# EAGLE board Sensor Board@3235be6d76c845ecb669902bdd898175 (EAGLE 6.4)
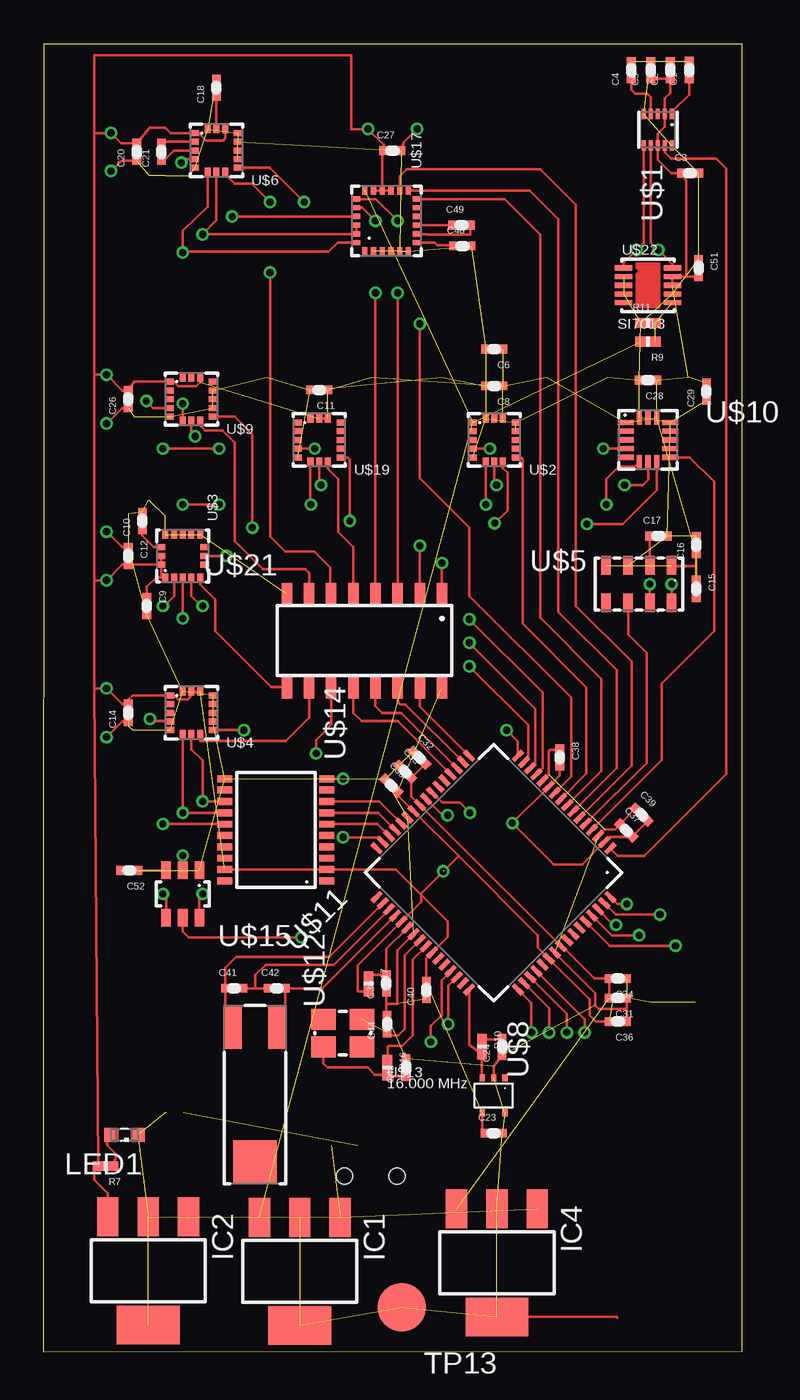
[diagram p0: board, top side]
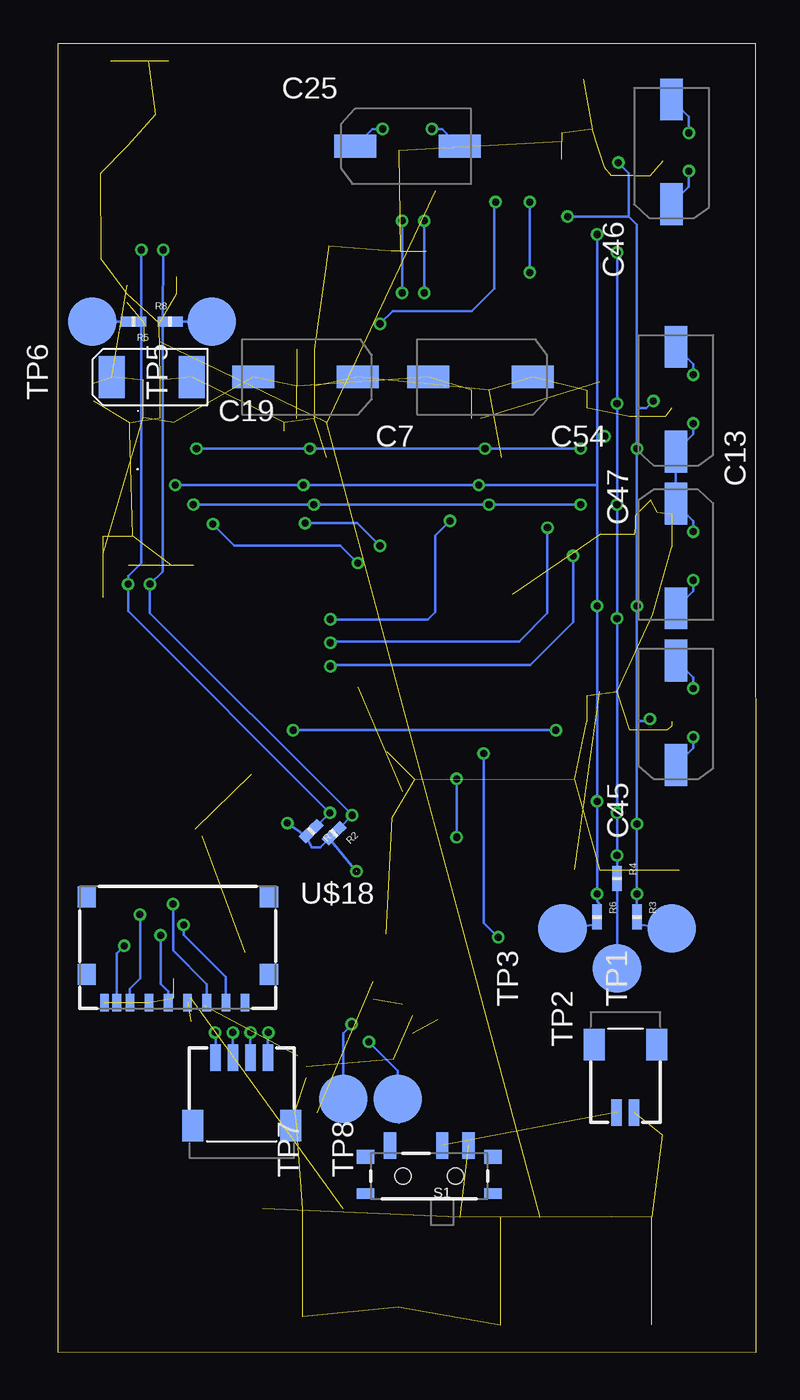
[diagram p1: board, bottom side, seen from below]

Size 40.03 x 75.05 mm. Coordinates in mm from the lower left corner, seen from the top.
Outline: 40.03,0.03 0,0 0.03,75.05 40.03,75.05 40.03,0.03
Copper layers (1*2*15*16): Top 0.035mm / dielectric 0.2mm / Route2 0.0175mm / dielectric 1.1mm / Route15 0.0175mm / dielectric 0.2mm / Bottom 0.035mm
Design rules "SeeedStudio_DRU_no_angle_20130527": minimum track width 6mil, minimum drill 12mil, track to track 6mil, track to pad 6mil, pad to pad 6mil, via to via 6mil, smd to smd 0mil, copper to edge 10mil, drill to drill 10mil, minimum pad ring 6mil, minimum via ring 6mil, stop-mask expansion 2mil, vias tented up to drill 25mil, thermal gap 10mil

## Footprints (pad centres in the part's own frame; a part is rotated, then mirrored left to right if it is on the bottom)
C0402 = smd 0.5 x 0.5: 1 -0.5,0; 2 0.5,0
4.3X7.3SMD = smd 2.4 x 1.3: P$1 -3,0; P$2 3,0
EIA6032 = smd 1.5 x 2.4: P$1 -2.3,0; P$2 2.3,0
SOT223 = smd 1.219 x 2.235: 1 -2.311,-3.099; 2 0,-3.099; 3 2.311,-3.099 | smd 3.6 x 2.2: 4 0,3.099
501568-0207 = smd 0.6 x 1.5: P$1 -0.5,3.9; P$2 0.5,3.9 | smd 1.2 x 1.8: P$5 -1.8,0; P$6 1.8,0
LED_SML0603 = smd 0.8 x 0.8: A 0.75,0; C -0.75,0
R0402 = smd 0.6 x 0.55: 1 -0.425,0; 2 0.425,0
SWITCH-SPST-SMD-A = smd 0.7 x 1.5: 1 -2.25,-1.75; 2 -0.75,-1.75; 3 2.25,-1.75 | smd 1 x 0.6: GND1 -3.65,1; GND3 3.65,1 | smd 1 x 0.8: GND2 -3.65,-1.1; GND4 3.65,-1.1 | hole 0.9: -1.5,0; 1.5,0
TESTPAD(ROUND) = smd 2.794 x 2.794: P$1 0,0
DFN-10(2X2) = smd 0.6 x 0.225: P$1 -0.9,0.8; P$2 -0.9,0.4; P$3 -0.9,0; P$4 -0.9,-0.4; P$5 -0.9,-0.8; P$6 0.9,-0.8; P$7 0.9,-0.4; P$8 0.9,0; P$9 0.9,0.4; P$10 0.9,0.8
LGA-16(3X3) = smd 0.45 x 0.345: P$1 -1.225,1; P$2 -1.225,0.5; P$3 -1.225,0; P$4 -1.225,-0.5; P$5 -1.225,-1; P$9 1.225,-1; P$10 1.225,-0.5; P$11 1.225,0; P$12 1.225,0.5; P$13 1.225,1 | smd 0.345 x 0.45: P$6 -0.5,-1.225; P$7 0,-1.225; P$8 0.5,-1.225; P$14 0.5,1.225; P$15 0,1.225; P$16 -0.5,1.225
LGA-8(5X3) = smd 0.55 x 1.05: P$1 -1.875,-1.075; P$2 -0.625,-1.075; P$3 0.625,-1.075; P$4 1.875,-1.075; P$5 1.875,1.075; P$6 0.625,1.075; P$7 -0.625,1.075; P$8 -1.875,1.075
501568-0407 = smd 0.6 x 1.5: P$1 -1.5,3.9; P$2 -0.5,3.9; P$3 0.5,3.9; P$4 1.5,3.9 | smd 1.2 x 1.8: P$5 -2.8,0; P$6 2.8,0
SOT323-5L = smd 0.4 x 0.3: P$1 1,-0.65; P$2 1,0; P$3 1,0.65; P$4 -1,0.65; P$5 -1,-0.65
LGA-16(3X3.25) = smd 0.925 x 0.3: P$1 -1.274,1; P$2 -1.274,0.5; P$3 -1.274,0; P$4 -1.274,-0.5; P$5 -1.274,-1; P$9 1.274,-1; P$10 1.274,-0.5; P$11 1.274,0; P$12 1.274,0.5; P$13 1.274,1 | smd 0.3 x 0.8: P$6 -0.5,-1.275; P$7 0,-1.275; P$8 0.5,-1.275; P$14 0.5,1.275; P$15 0,1.275; P$16 -0.5,1.275
S-PQFP-G64 = smd 0.75 x 0.27: P$1 -5.725,3.75; P$2 -5.725,3.25; P$3 -5.725,2.75; P$4 -5.725,2.25; P$5 -5.725,1.75; P$6 -5.725,1.25; P$7 -5.725,0.75; P$8 -5.725,0.25; P$9 -5.725,-0.25; P$10 -5.725,-0.75; P$11 -5.725,-1.25; P$12 -5.725,-1.75; P$13 -5.725,-2.25; P$14 -5.725,-2.75; P$15 -5.725,-3.25; P$16 -5.725,-3.75; P$33 5.725,-3.75; P$34 5.725,-3.25; P$35 5.725,-2.75; P$36 5.725,-2.25; P$37 5.725,-1.75; P$38 5.725,-1.25; P$39 5.725,-0.75; P$40 5.725,-0.25; P$41 5.725,0.25; P$42 5.725,0.75; P$43 5.725,1.25; P$44 5.725,1.75; P$45 5.725,2.25; P$46 5.725,2.75; P$47 5.725,3.25; P$48 5.725,3.75 | smd 0.27 x 0.75: P$17 -3.75,-5.725; P$18 -3.25,-5.725; P$19 -2.75,-5.725; P$20 -2.25,-5.725; P$21 -1.75,-5.725; P$22 -1.25,-5.725; P$23 -0.75,-5.725; P$24 -0.25,-5.725; P$25 0.25,-5.725; P$26 0.75,-5.725; P$27 1.25,-5.725; P$28 1.75,-5.725; P$29 2.25,-5.725; P$30 2.75,-5.725; P$31 3.25,-5.725; P$32 3.75,-5.725; P$49 3.75,5.725; P$50 3.25,5.725; P$51 2.75,5.725; P$52 2.25,5.725; P$53 1.75,5.725; P$54 1.25,5.725; P$55 0.75,5.725; P$56 0.25,5.725; P$57 -0.25,5.725; P$58 -0.75,5.725; P$59 -1.25,5.725; P$60 -1.75,5.725; P$61 -2.25,5.725; P$62 -2.75,5.725; P$63 -3.25,5.725; P$64 -3.75,5.725
CYLINDRICAL-(1.9DIAX6L) = smd 2.5 x 1: P$1 3.875,1.25; P$2 3.875,-1.25 | smd 2.5 x 2.5: P$3 -3.875,0
4-SMD(3.2X2.5) = smd 1.4 x 1.2: P$1 -1.1,-0.8; P$2 1.1,-0.8; P$3 1.1,0.8; P$4 -1.1,0.8
TSSOP-(PW)-20 = smd 0.4 x 0.85: P$1 -2.925,-2.925; P$2 -2.275,-2.925; P$3 -1.625,-2.925; P$4 -0.975,-2.925; P$5 -0.325,-2.925; P$6 0.325,-2.925; P$7 0.975,-2.925; P$8 1.625,-2.925; P$9 2.275,-2.925; P$10 2.925,-2.925; P$11 2.925,2.925; P$12 2.275,2.925; P$13 1.625,2.925; P$14 0.975,2.925; P$15 0.325,2.925; P$16 -0.325,2.925; P$17 -0.975,2.925; P$18 -1.625,2.925; P$19 -2.275,2.925; P$20 -2.925,2.925
SOT23-6 = smd 0.55 x 1: P$1 0.95,1.35; P$2 0,1.35; P$3 -0.95,1.35; P$4 -0.95,-1.35; P$5 0,-1.35; P$6 0.95,-1.35
LGA-24(4X4) = smd 0.432 x 0.3: P$1 -1.725,1.25; P$6 -1.725,-1.25; P$13 1.725,-1.25; P$18 1.725,1.25 | smd 0.45 x 0.3: P$2 -1.725,0.75; P$3 -1.725,0.25; P$4 -1.725,-0.25; P$5 -1.725,-0.75; P$14 1.725,-0.75; P$15 1.725,-0.25; P$16 1.725,0.25; P$17 1.725,0.75 | smd 0.3 x 0.432: P$7 -1.25,-1.725; P$12 1.25,-1.725; P$19 1.25,1.725; P$24 -1.25,1.725 | smd 0.3 x 0.45: P$8 -0.75,-1.725; P$9 -0.25,-1.725; P$10 0.25,-1.725; P$11 0.75,-1.725; P$20 0.75,1.725; P$21 0.25,1.725; P$22 -0.25,1.725; P$23 -0.75,1.725
SD-105027-1001 = smd 0.5 x 1: P$1 3.85,-6.66; P$2 2.75,-6.66; P$3 1.65,-6.66; P$4 0.55,-6.66; P$5 -0.55,-6.66; P$6 -1.65,-6.66; P$7 -2.75,-6.66; P$8 -3.51,-6.66; P$9 -4.21,-6.66 | smd 1.05 x 1.2: P$10 -5.225,-0.6; P$11 -5.225,-5.05; P$12 5.225,-5.05; P$13 5.225,-0.6
SOIC-16 = smd 0.6 x 1.27: P$1 -4.445,-2.675; P$2 -3.175,-2.675; P$3 -1.905,-2.675; P$4 -0.635,-2.675; P$5 0.635,-2.675; P$6 1.905,-2.675; P$7 3.175,-2.675; P$8 4.445,-2.675; P$9 4.445,2.675; P$10 3.175,2.675; P$11 1.905,2.675; P$12 0.635,2.675; P$13 -0.635,2.675; P$14 -1.905,2.675; P$15 -3.175,2.675; P$16 -4.445,2.675
DFN-10(3X3) = smd 1 x 0.3: P$1 -1.4,1; P$2 -1.4,0.5; P$3 -1.4,0; P$4 -1.4,-0.5; P$5 -1.4,-1; P$6 1.4,-1; P$7 1.4,-0.5; P$8 1.4,0; P$9 1.4,0.5; P$10 1.4,1

## Placement (x,y rotation side)
C1  100nF  [C0402]  37,73.54 90 top
C2  1uF  [C0402]  35.92,73.53 90 top
C3  100nF  [C0402]  37.06,67.61 0 top
C4  100nF  [C0402]  33.68,73.53 90 top
C5  100nF  [C0402]  34.81,73.53 90 top
C6  0.1uF  [C0402]  25.83,57.53 180 top
C7  10uF  [4.3X7.3SMD]  25.83,55.93 0 bottom
C8  100nF  [C0402]  25.83,55.42 180 top
C9  100nF  [C0402]  5.92,42.8 270 top
C10  10nF  [C0402]  5.66,47.68 90 top
C11  1uF  [C0402]  15.8,55.19 180 top
C12  10uF  [C0402]  4.85,45.67 270 top
C13  100nF  [4.3X7.3SMD]  4.6,45.67 90 bottom
C14  100nF  [C0402]  4.85,36.68 90 top
C15  100nF  [C0402]  37.41,43.79 270 top
C16  10uF  [C0402]  37.41,46.3 90 top
C17  100nF  [C0402]  35.25,46.81 0 top
C18  4.7uF  [C0402]  9.91,72.52 90 top
C19  1uF  [EIA6032]  34.65,55.93 0 bottom
C20  100nF  [C0402]  5.33,68.85 90 top
C21  0.22uF  [C0402]  6.76,68.85 90 top
C23  0.1uF  [C0402]  25.8,12.57 0 top
C24  1uF  [C0402]  26.28,17.53 90 top
C25  10uF  [4.3X7.3SMD]  19.99,69.16 180 bottom
C26  100nF  [C0402]  4.85,54.66 90 top
C27  100nF  [C0402]  19.99,68.91 0 top
C28  0.1uF  [C0402]  34.65,55.75 180 top
C29  0.1uF  [C0402]  38,55.09 90 top
C30  0.1uF  [C0402]  19.65,21.16 90 top
C31  0.1uF  [C0402]  32.92,20.32 180 top
C32  0.1uF  [C0402]  21.53,34.1 315 top
C33  2.2uF  [C0402]  20.72,33.3 315 top
C34  1.0uF  [C0402]  32.92,21.44 180 top
C35  0.01uF  [C0402]  19.93,32.51 315 top
C36  0.1uF  [C0402]  32.92,18.97 180 top
C37  0.01uF  [C0402]  33.4,29.93 315 top
C38  0.1uF  [C0402]  29.59,34.11 270 top
C39  0.01uF  [C0402]  34.28,30.83 315 top
C40  1.0uF  [C0402]  21.95,20.78 90 top
C41  24pF  [C0402]  10.92,20.88 0 top
C42  24pF  [C0402]  13.36,20.88 0 top
C43  10pF  [C0402]  20.78,16.33 90 top
C44  10pF  [C0402]  19.69,18.82 90 top
C45  10uF  [4.3X7.3SMD]  4.6,36.68 270 bottom
C46  10uF  [4.3X7.3SMD]  4.85,68.85 270 bottom
C47  10uF  [4.3X7.3SMD]  4.6,54.66 270 bottom
C48  4.7uF  [C0402]  24,63.45 0 top
C49  0.22uF  [C0402]  23.95,64.64 0 top
C51  [C0402]  37.54,62.18 270 top
C52  0.1uF  [C0402]  4.91,27.64 180 top
C54  10uF  [4.3X7.3SMD]  15.8,55.93 0 bottom
IC1  LT1963EST-1.5  [SOT223]  14.68,4.65 180 top
IC2  LT1963EST-1.5  [SOT223]  5.99,4.67 180 top
IC4  LT1963EST-1.5  [SOT223]  25.98,5.13 180 top
J1  501568-0207  [501568-0207]  7.49,17.65 180 bottom
LED1  Green  [LED_SML0603]  4.64,12.47 180 top
R1  10k  [R0402]  25.5,29.9 225 bottom
R2  10k  [R0402]  24.18,29.77 225 bottom
R3  0  [R0402]  6.83,24.97 270 bottom
R4  0  [R0402]  7.98,27.18 270 bottom
R5  0  [R0402]  35.69,59.11 180 bottom
R6  0  [R0402]  9.12,24.97 270 bottom
R7  10k  [R0402]  3.54,10.69 180 top
R8  0  [R0402]  33.59,59.11 0 bottom
R9  2.0k  [R0402]  34.65,57.96 180 top
R10  200  [R0402]  25.13,17.53 270 top
R11  1.0k  [R0402]  34.65,59.03 0 top
R16  0  [R0402]  19.7,16.33 270 top
R17  10k  [R0402]  18.62,21.13 270 top
S1  Power  [SWITCH-SPST-SMD-A]  18.75,10.11 180 bottom
TP1  TESTPAD(ROUND)  [TESTPAD(ROUND)]  4.85,24.32 270 bottom
TP2  TESTPAD(ROUND)  [TESTPAD(ROUND)]  7.98,22.02 270 bottom
TP3  TESTPAD(ROUND)  [TESTPAD(ROUND)]  11.1,24.32 270 bottom
TP5  TESTPAD(ROUND)  [TESTPAD(ROUND)]  31.2,59.11 270 bottom
TP6  TESTPAD(ROUND)  [TESTPAD(ROUND)]  38.05,59.11 270 bottom
TP7  TESTPAD(ROUND)  [TESTPAD(ROUND)]  23.67,14.53 270 bottom
TP8  TESTPAD(ROUND)  [TESTPAD(ROUND)]  20.55,14.53 270 bottom
TP13  TESTPAD(ROUND)  [TESTPAD(ROUND)]  20.52,2.59 0 top
U$1  MAG3110  [DFN-10(2X2)]  35.21,70.1 270 top
U$2  H3LIS331DLTR  [LGA-16(3X3)]  25.83,52.32 0 top
U$3  L3GD20H  [LGA-16(3X3)]  7.98,45.67 90 top
U$4  LPS331AP  [LGA-16(3X3)]  8.48,36.68 0 top
U$5  MPL3115A2  [LGA-8(5X3)]  34.12,44.06 180 top
U$6  LSM303D  [LGA-16(3X3)]  9.91,68.92 0 top
U$7  501568-0407  [501568-0407]  29.49,13 0 bottom
U$8  STLM20  [SOT323-5L]  25.8,14.73 90 top
U$9  LIS3DH  [LGA-16(3X3)]  8.47,54.66 0 top
U$10  ADXL362  [LGA-16(3X3.25)]  34.65,52.32 0 top
U$11  TM4C1233H6PM  [S-PQFP-G64]  25.79,27.51 225 top
U$12  32.768 kHz  [CYLINDRICAL-(1.9DIAX6L)]  12.12,14.78 90 top
U$13  16.000 MHz  [4-SMD(3.2X2.5)]  17.14,18.31 0 top
U$14  TXB0108  [TSSOP-(PW)-20]  13.31,29.96 90 top
U$15  ADT7301  [SOT23-6]  7.98,26.29 0 top
U$17  LSM9DS0  [LGA-24(4X4)]  19.66,64.89 90 top
U$18  SD-105027-101  [SD-105027-1001]  33.15,26.72 0 bottom
U$19  MAX21000  [LGA-16(3X3)]  15.8,52.32 0 top
U$21  SN74HC42  [SOIC-16]  18.39,40.82 180 top
U$22  SI7013  [DFN-10(3X3)]  34.65,61.19 0 top

## Library data of the parts
C1-C18 C20 C21 C23-C49 C51 C52 C54 R1-R11 R16 R17 TP1-TP3 TP7 TP8 TP13 = Kas-Passives
C19 = SparkFun-Passives
IC1 IC2 IC4 = linear-technology; MPN: LT1963EST-1.5; OC_FARNELL: 1663528; OC_NEWARK: 57M7534
J1 TP5 TP6 U$7 U$18 = Kas-Connectors
LED1 = eagle-ltspice; SPICEMODEL: NONE; SPICEPREFIX: D; SPICETYPE: diode
S1 = SparkFun-Electromechanical
U$1-U$6 U$8-U$10 U$15 U$17 U$19 U$22 = Kas-Sensors
U$11 = Kas-Microcontroller
U$12 U$13 = Kas-Crystal
U$14 U$21 = Kas-Buffers & Level Shifters

## Nets
1.2V: C31.2 C32.2 C33.2 C34.2 IC4.3 U$11.P$25 U$11.P$56
3.0V: IC1.3 R9.2 U$2.P$1 U$17.P$18
3.3V: C2.1 C3.1 C5.1 C6.1 C7.P$1 C8.1 C9.1 C11.1 C12.2 C13.P$1 C14.2 C15.1 C16.1 C19.P$1 C20.2 C23.1 C25.P$1 C26.2 C27.1 C28.1 C29.2 C35.2 C36.2 C37.2 C38.2 C39.2 C40.2 C45.P$1 C46.P$1 C47.P$1 C51.2 C54.P$1 IC2.3 R1.2 R2.2 R7.2 R17.2 U$1.P$2 U$1.P$8 U$2.P$14 U$3.P$1 U$3.P$15 U$3.P$16 U$4.P$1 U$4.P$14 U$4.P$15 U$5.P$1 U$5.P$4 U$6.P$1 U$6.P$14 U$8.P$4 U$9.P$1 U$9.P$14 U$10.P$1 U$10.P$14 U$11.P$2 U$11.P$11 U$11.P$26 U$11.P$37 U$11.P$42 U$11.P$54 U$14.P$2 U$14.P$19 U$17.P$15 U$17.P$16 U$17.P$17 U$18.P$4 U$19.P$14 U$19.P$15 U$21.P$16 U$22.P$8 U$22.P$9
ANALOG-OUT-STLM20: R10.2 U$8.P$3 U$11.P$48
CS-ADT7301: U$15.P$5 U$21.P$11
CS-ADXL362: U$10.P$8 U$21.P$1
CS-H3LIS331DLTR: U$2.P$8 U$21.P$2
CS-LIS3DH: U$9.P$8 U$21.P$7
CS-LPS331: U$4.P$8 U$21.P$10
CS-LS3GD20: U$3.P$5 U$21.P$9
CS-LSM9D30-G: U$17.P$19 U$21.P$3
CS-LSM9DS0-XM: U$17.P$20 U$21.P$4
CS-LSM303: U$6.P$8 U$21.P$6
CS-MAX21000: U$19.P$8 U$21.P$5
DEN-L3GD: U$3.P$8
GND: C1.2 C2.2 C3.2 C4.2 C5.2 C6.2 C7.P$2 C8.2 C9.2 C10.2 C11.2 C12.1 C13.P$2 C14.1 C15.2 C16.2 C17.2 C18.2 C19.P$2 C20.1 C23.2 C24.1 C25.P$2 C26.1 C27.2 C28.2 C29.1 C30.1 C31.1 C32.1 C33.1 C34.1 C35.1 C36.1 C37.1 C38.1 C39.1 C40.1 C43.2 C44.2 C45.P$2 C46.P$2 C47.P$2 C48.2 C51.1 C52.2 C54.P$2 IC1.2 IC1.4 IC2.2 IC2.4 IC4.2 IC4.4 J1.P$1 LED1.C R11.1 TP13.P$1 U$1.P$5 U$1.P$10 U$2.P$5 U$2.P$12 U$2.P$13 U$2.P$16 U$3.P$9 U$3.P$10 U$3.P$11 U$3.P$12 U$3.P$13 U$4.P$5 U$4.P$10 U$4.P$11 U$4.P$12 U$4.P$13 U$4.P$16 U$5.P$3 U$6.P$5 U$6.P$10 U$6.P$12 U$6.P$13 U$6.P$16 U$8.P$2 U$8.P$5 U$9.P$5 U$9.P$10 U$9.P$12 U$10.P$12 U$10.P$13 U$10.P$16 U$11.P$3 U$11.P$12 U$11.P$27 U$11.P$39 U$11.P$55 U$14.P$11 U$15.P$1 U$17.P$2 U$17.P$3 U$17.P$4 U$17.P$5 U$17.P$6 U$18.P$6 U$18.P$9 U$19.P$5 U$21.P$8 U$22.P$2 U$22.P$3 U$22.P$4 U$22.P$7
INT1-L3GD: U$3.P$7 U$11.P$15
INT1-MAG3110: U$1.P$9 U$11.P$1
INT1-MPL311: U$5.P$6 U$11.P$5
INT2-ADXL362: U$10.P$9 U$11.P$4
INT2-H3LIS331: U$2.P$9 U$11.P$9
INT2-LIS3DH: U$9.P$9 U$11.P$14
INT2-LPS331: U$4.P$9 U$11.P$16
INT2-LSM303: U$6.P$9 U$11.P$10
INT2-MAX21000: U$11.P$13 U$19.P$9
LSM9D-DEN-G: U$17.P$10
LSM9D-DRGY-G: U$11.P$8 U$17.P$12
LSM9D-INT1-XM: U$11.P$7 U$17.P$13
LSM9D-INT2-XM: U$11.P$6 U$17.P$14
MISO-A: U$11.P$28 U$14.P$8
MISO-B: R6.1 U$2.P$7 U$3.P$4 U$4.P$7 U$6.P$7 U$9.P$7 U$10.P$7 U$14.P$13 U$15.P$6 U$17.P$22 U$17.P$23 U$19.P$7
MOSI-A: U$11.P$29 U$14.P$7
MOSI-B: R4.1 U$2.P$6 U$3.P$3 U$4.P$6 U$6.P$6 U$9.P$6 U$10.P$6 U$14.P$14 U$15.P$2 U$17.P$24 U$19.P$6
N$1: C1.1 U$1.P$1
N$2: C52.1 U$15.P$3
N$3: C4.1 U$1.P$4
N$4: C10.1 U$3.P$14
N$5: C17.1 U$5.P$2
N$6: C18.1 U$6.P$15
N$7: C21.2 U$6.P$2
N$8: C48.1 U$17.P$7
N$9: C24.2 R10.1
N$10: C30.2 R17.1 U$11.P$38
N$11: C42.2 U$11.P$36 U$12.P$2
N$12: C41.1 U$11.P$34 U$12.P$1
N$13: C41.2 C42.1 U$11.P$35
N$14: C43.1 R16.2 U$13.P$1
N$15: C21.1 U$6.P$3
N$16: C44.1 U$11.P$40 U$13.P$3
N$17: R16.1 U$11.P$41
N$18: R9.1 R11.2 U$22.P$6
N$19: J1.P$2 S1.2
N$21: C49.2 U$17.P$8
N$22: C49.1 U$17.P$9
N$23: IC1.1 IC2.1 IC4.1 S1.1
N$24: R5.2 TP6.P$1
N$26: R8.2 TP5.P$1
N$27: LED1.A R7.1
N$32: R3.2 TP1.P$1
N$33: R4.2 TP2.P$1
N$34: R6.2 TP3.P$1
SCL-0: R1.1 R5.1 U$1.P$7 U$5.P$8 U$11.P$23 U$22.P$10
SCLK-A: U$11.P$30 U$14.P$6
SCLK-B: R3.1 U$2.P$4 U$3.P$2 U$4.P$4 U$6.P$4 U$9.P$4 U$10.P$4 U$14.P$15 U$15.P$4 U$17.P$21 U$19.P$4
SD-CARD-INSERT: U$11.P$60 U$18.P$8
SD-CS: U$11.P$62 U$18.P$2
SD-MISO: U$11.P$63 U$18.P$7
SD-MOSI: U$11.P$64 U$18.P$3
SD-SCLK: U$11.P$61 U$18.P$5
SDA-0: R2.1 R8.1 U$1.P$6 U$5.P$7 U$11.P$24 U$22.P$1
SPI-ADDR0: U$11.P$17 U$21.P$15
SPI-ADDR1: U$11.P$18 U$21.P$14
SPI-ADDR2: U$11.P$19 U$21.P$13
SPI-ADDR3: U$11.P$20 U$21.P$12
SPI-ENABLE: U$11.P$31 U$14.P$10
SWCLK: U$7.P$1 U$11.P$52
SWDIO: U$7.P$2 U$11.P$51
SWO: U$7.P$4 U$11.P$49
TDI: U$7.P$3 U$11.P$50
U1RX: TP8.P$1 U$11.P$45
U1TX: TP7.P$1 U$11.P$46

## Tracks (layer width: path | path; a pad name or v marks a point on that pad's centre or on a via)
1.2V  (1 unrouted)
  Top 0.152: C32.2 C33.2 21.07,31.87 U$11.P$25 U$11.P$56 | U$11.P$56 29.66,23.24 29.69,23.24 | C31.2 C34.2 31.57,21.44 29.82,23.19 29.76,23.19 U$11.P$56
3.0V  (3 unrouted)
3.3V  (via drill 0.41)  (20 unrouted)
  Top 0.152: C36.2 31.65,18.97 31.29,19.33 31.29,20.24 U$11.P$54 28.32,23.21 28.32,23.92 23.78,28.46 | C39.2 C37.2 33.76,29.57 32.45,29.57 U$11.P$2 30.87,27.99 29.24,27.99 v26.87,30.35 U$11.P$11 29.59,33.08 C38.2 | U$4.P$1 5.1,37.68 4.85,37.43 C14.2 4.5,37.18 v3.61,38.07 2.89,38.07 | U$3.P$15 U$3.P$16 | U$3.P$16 C12.2 4.5,45.17 v3.61,44.27 2.89,44.27 | U$4.P$1 7,37.68 | U$4.P$15 U$4.P$14 | C5.1 C2.1 35.92,72.21 35.61,71.91 U$1.P$2 35.61,70.28 35.2,69.88 35.2,69.21 U$1.P$8 35.21,68.38 35.98,67.61 C3.1 36.83,67.19 36.83,61.68 | C35.2 20.39,31.85 U$11.P$26 23.78,28.46 | C40.2 21.95,22.6 U$11.P$42 23.16,23.82 23.16,24.71 21.65,26.23 | U$17.P$17 U$17.P$16 | U$17.P$15 U$17.P$16 | IC2.3 3.68,9.12 2.9,9.91 2.9,10.69 R7.2 2.89,38.07 | U$14.P$19 U$14.P$2 20.19,27.69 21.65,26.23 | 21.65,26.23 21.65,25.84 U$11.P$37 18.01,22.2 18.01,20.7 18.02,20.71 R17.2 | v22.91,27.58 21.65,26.33 21.65,26.23 | U$19.P$15 U$19.P$14 | 23.78,28.46 22.94,27.61 | 2.89,38.07 2.89,44.27 | 2.89,44.27 2.89,56.06 | 2.89,56.06 2.89,69.93 | 2.89,69.93 2.89,74.37 17.63,74.37 17.63,70.15 v18.59,70.15 19.49,69.26 C27.1 19.41,68.83 U$17.P$16 | 2.89,69.93 v3.86,69.93 4.44,69.35 C20.2 6.07,70.23 6.98,70.23 7.29,69.92 U$6.P$1 8.9,69.92 9.33,69.49 10.29,69.49 10.41,69.61 U$6.P$14 | 2.89,56.06 v3.61,56.06 4.5,55.16 C26.2 5.2,55.66 U$9.P$1 7.47,55.66 7.73,55.4 8.74,55.4 8.97,55.63 U$9.P$14 | U$3.P$16 6.75,44.44 U$3.P$1 6.45,44.44 5.92,43.92 C9.1 | U$4.P$15 | C16.1 37.41,45.08 | 37.41,45.08 C15.1 | U$5.P$1 36.04,45.08 37.41,45.08 | 36.83,61.68 U$22.P$9 U$22.P$8 | 36.83,61.68 C51.2 | U$8.P$4 25.15,12.72 C23.1 | U$4.P$1 7.46,37.68 7.72,37.44 8.26,37.44 8.48,37.66 U$4.P$15
  Bottom 0.152: C47.P$1 3.61,56.67 v3.61,56.06 | C45.P$1 3.61,38.69 v3.61,38.07 | C13.P$1 3.61,43.66 v3.61,44.27 | C46.P$1 3.86,70.86 v3.86,69.93 | C25.P$1 17.98,70.15 v18.59,70.15 | v26.87,30.35 R1.2 25.48,28.96 24.99,28.96 R2.2 v22.92,27.58 v22.91,27.58
ANALOG-OUT-STLM20
  Top 0.152: U$11.P$48 24.4,17.64 R10.2 25.12,16.86 25.12,15.77 25.15,15.75 U$8.P$3
CS-ADT7301  (via drill 0.41)
  Top 0.152: U$21.P$11 16.48,35.99 15.62,35.13 v15.62,34.34 | U$15.P$5 7.98,24.13 8.31,23.8 v14.78,23.8
  Bottom 0.152: v15.62,34.34 15.62,24.64 v14.78,23.8
CS-ADXL362  (via drill 0.41)
  Top 0.152: U$21.P$1 v22.83,45.26 | v31.14,47.5 33.2,47.5 35.15,49.45 U$10.P$8
  Bottom 0.152: v22.83,45.26 23.85,46.28 29.92,46.28 v31.14,47.5
CS-H3LIS331DLTR  (via drill 0.41)
  Top 0.152: U$21.P$2 v21.56,46.25 | v25.86,47.55 26.59,48.29 26.59,50.44 26.33,50.7 U$2.P$8
  Bottom 0.152: v25.86,47.55 22.86,47.55 v21.56,46.25
CS-LIS3DH
  Top 0.152: U$21.P$7 15.21,44.68 14.99,44.91 12.57,44.91 10.95,46.53 10.95,52.17 10.26,52.86 9.27,52.86 9,53.13 U$9.P$8
CS-LPS331
  Top 0.152: U$21.P$10 15.21,36.4 13.87,35.05 8.98,35.05 U$4.P$8
CS-LS3GD20
  Top 0.152: U$21.P$9 13.04,38.14 9.83,41.35 9.83,43.18 8.98,44.03 U$3.P$5
CS-LSM9D30-G  (via drill 0.41)
  Top 0.152: U$21.P$3 v20.29,60.76 | U$17.P$19 19.04,66.14 v20.29,64.89
  Bottom 0.152: v20.29,60.76 v20.29,64.89
CS-LSM9DS0-XM  (via drill 0.41)
  Top 0.152: U$21.P$4 v19.02,60.76 | 17.69,65.63 U$17.P$20 18.27,65.64 v19.02,64.89
  Bottom 0.152: v19.02,60.76 v19.02,64.89
CS-LSM303  (via drill 0.41)
  Top 0.152: v12.98,61.92 12.98,46.79 13.84,45.92 15.52,45.92 16.43,45.01 16.43,43.54 U$21.P$6 | v12.98,65.96 11.94,67 10.95,67 10.41,67.55 U$6.P$8
  Bottom 0.152: v12.98,61.92 v12.98,65.96
CS-MAX21000
  Top 0.152: U$21.P$5 17.75,46.18 16.89,47.04 16.89,50.09 16.3,50.68 U$19.P$8
GND  (via drill 0.41)  (103 unrouted)
  Top 0.152: U$11.P$55 29.31,22.91 31.62,20.6 31.62,19.89 31.83,19.68 33.39,19.68 33.42,19.71 | 21.2,23.99 U$11.P$39 20.28,23.06 20.28,19.99 19.65,19.99 | v3.61,53.26 4.5,54.16 C26.1 | v3.61,35.28 4.5,36.18 C14.1 | v3.61,47.07 4.5,46.17 C12.1 | LED1.C 5.21,12.52 | v3.86,67.74 4.47,68.35 C20.1 | U$11.P$12 28.96,33.15 28.96,34.49 29.01,34.54 29.52,34.54 C38.1 | U$8.P$2 25.8,16.39 C24.1 | v21.41,70.15 20.64,69.38 C27.2 | IC4.4 32.84,2.03 32.89,1.98 | C44.2 19.65,19.5 19.65,19.99 | 19.65,19.99 C30.1 | 33.82,31.27 C39.1 33.04,30.3 C37.1 | U$11.P$3 32.17,30 32.76,30 C37.1 | 32.94,30.37 C37.1 | C2.2 | C36.1 33.42,19.71 | 33.42,19.71 C31.1
  Bottom 0.152: v3.61,53.26 3.61,52.65 C47.P$2 C13.P$2 3.61,47.68 v3.61,47.07 | C45.P$2 3.61,34.67 v3.61,35.28 | C46.P$2 3.86,66.84 v3.86,67.74 | C25.P$2 22,70.15 v21.41,70.15
INT1-L3GD  (via drill 0.41)
  Top 0.152: v10.49,45.67 U$3.P$7 | U$11.P$15 27.79,34.1 27.79,35.97 v24.41,39.34
  Bottom 0.152: v24.41,39.34 24.36,39.42 12.95,39.42 10.49,41.88 v10.49,45.67
INT1-MAG3110
  Top 0.152: U$11.P$1 32.92,28.47 34.44,28.47 39.14,33.17 39.14,67.87 38.56,68.45 35.99,68.45 35.61,68.83 U$1.P$9
INT1-MPL311
  Top 0.152: U$11.P$5 34.57,33.81 34.57,40.09 33.5,41.16 U$5.P$6
INT2-ADXL362
  Top 0.152: U$10.P$9 37.04,51.32 38.43,49.94 38.43,41.35 35.43,38.35 35.43,33.97 U$11.P$4
INT2-H3LIS331
  Top 0.152: U$11.P$9 31.12,33.18 31.12,38.14 27.46,41.8 27.46,51.23 27.37,51.32 U$2.P$9
INT2-LIS3DH  (via drill 0.41)
  Top 0.152: 9.92,53.66 U$9.P$9 10.94,53.66 11.96,52.64 v11.96,47.29 | U$11.P$14 28.19,33.8 28.19,36.91 v24.41,40.69
  Bottom 0.152: v24.41,40.69 24.33,40.77 13.59,40.77 11.96,42.39 v11.96,47.29
INT2-LPS331  (via drill 0.41)
  Top 0.152: v11.48,35.68 U$4.P$9 | U$11.P$16 27.19,35.03 v26.54,35.68
  Bottom 0.152: v26.54,35.68 v11.48,35.68
INT2-LSM303  (via drill 0.41)
  Top 0.152: 11.53,67.92 U$6.P$9 12.98,67.92 v14.94,65.96 | U$11.P$10 30.25,33.03 30.25,37.54 24.41,43.38 24.41,47.29 21.56,50.14 21.56,50.57 21.56,51.05 v21.56,58.98
  Bottom 0.152: v14.94,65.96 15.01,65.89 15.01,61.01 16.31,59.72 20.83,59.72 v21.56,58.98
INT2-MAX21000  (via drill 0.41)
  Top 0.152: v17.55,47.68 17.55,51.2 17.42,51.32 U$19.P$9 | U$11.P$13 28.6,33.5 28.6,37.85 v24.41,42.04
  Bottom 0.152: v24.41,42.04 18.82,42.04 18.39,42.47 18.39,46.84 v17.55,47.68
LSM9D-DRGY-G
  Top 0.152: U$11.P$8 31.98,33.34 31.98,38.63 28.47,42.13 28.47,64.08 26.42,66.14 U$17.P$12
LSM9D-INT1-XM
  Top 0.152: U$11.P$7 32.84,33.5 32.84,39.12 29.49,42.47 29.49,64.97 27.86,66.61 U$17.P$13
LSM9D-INT2-XM
  Top 0.152: U$11.P$6 33.71,33.65 33.71,39.6 30.51,42.81 30.51,65.81 28.47,67.84 20.8,67.84 20.41,67.45 U$17.P$14
MISO-A
  Top 0.152: U$14.P$8 19.24,31.59 U$11.P$28
MISO-B  (via drill 0.41)
  Top 0.152: U$6.P$7 9.91,64.92 9.12,64.13 v9.12,64.11 9.12,64.14 U$17.P$23 U$17.P$22 | U$2.P$7 25.83,49.81 v25.96,49.73 | U$15.P$6 8.93,26.12 v9.12,26.29 | U$4.P$7 8.48,34.58 9.12,33.93 v9.12,31.6 U$14.P$13 | U$3.P$4 8.48,43.37 9.04,42.8 v9.12,42.8 | U$19.P$7 15.8,49.83 v15.9,49.73 | U$10.P$7 34.65,50.04 34.34,49.73 v33.3,49.73 | U$9.P$7 8.48,52.74 v8.69,52.53
  Bottom 0.152: 9.12,49.73 v9.12,42.8 v9.12,31.6 v9.12,26.29 9.12,25.85 8.93,25.65 9.08,25.65 R6.1 | 9.12,49.73 9.12,52.4 | 9.12,52.4 v9.12,64.11 | v33.3,49.73 v25.96,49.73 v15.9,49.73 9.12,49.73 | v8.69,52.53 8.99,52.53 9.12,52.4
MOSI-A
  Top 0.152: U$14.P$7 19.18,30.94 U$11.P$29
MOSI-B  (via drill 0.41)
  Top 0.152: U$14.P$14 10.03,30.94 v7.98,30.94 U$4.P$6 | U$6.P$6 9.4,67.29 9.4,65.71 7.98,64.31 v7.98,63.07 8.3,63.11 16.33,63.11 16.85,63.64 U$17.P$24 | v10.06,48.62 v7.98,48.62 | U$19.P$6 15.3,48.73 v15.32,48.62 | U$2.P$6 25.33,48.73 v25.35,48.62 | U$3.P$3 v7.98,42.09 | v32.26,48.62 32.26,50.09 32.97,50.8 33.9,50.8 U$10.P$6 | v7.98,28.5 U$15.P$2 | U$9.P$6 v7.98,54.41 | U$4.P$6
  Bottom 0.152: 7.98,51 v7.98,48.62 | v7.98,48.62 v7.98,42.09 v7.98,30.94 v7.98,28.5 R4.1 | v7.98,48.62 v7.98,54.41 v7.98,63.07 | v32.26,48.62 v25.35,48.62 v15.32,48.62 v10.06,48.62
N$1
  Top 0.152: C1.1 37.01,72.13 36.13,71.25 U$1.P$1
N$2
  Top 0.152: C52.1 U$15.P$3
N$3
  Top 0.152: C4.1 33.68,72.42 33.91,72.19 34.59,72.19 34.81,71.97 U$1.P$4
N$4
  Top 0.152: C10.1 5.66,46.83 6.33,46.17 U$3.P$14
N$5
  Top 0.152: C17.1 U$5.P$2
N$6
  Top 0.152: U$6.P$15 C18.1
N$7
  Top 0.152: C21.2 6.83,69.42 U$6.P$2
N$8
  Top 0.152: U$17.P$7 22.42,63.64 22.56,63.5 23.3,63.5 C48.1
N$9
  Top 0.152: R10.1 26.21,17.95 C24.2
N$10
  Top 0.152: U$11.P$38 19.65,23.14 C30.2 18.72,21.66 R17.1
N$11
  Top 0.152: U$11.P$36 15.98,20.88 C42.2 13.86,19.15 U$12.P$2
N$12
  Top 0.152: U$11.P$34 16.37,22.68 11.05,22.68 10.42,22.05 C41.1 10.42,19.1 U$12.P$1
N$13
  Top 0.152: C41.2 12.14,20.88 | 12.14,20.88 C42.1 | U$11.P$35 16.62,22.22 12.73,22.22 12.14,21.64 12.14,20.88
N$14
  Top 0.152: U$13.P$1 16.04,16.57 16.28,16.33 18.57,16.33 18.99,15.91 R16.2 19.77,15.83 C43.1
N$15
  Top 0.152: U$6.P$3 7.45,68.92 6.88,68.35 C21.1
N$16  (1 unrouted)
  Top 0.152: 21.57,23.62 U$11.P$40 20.7,22.77 20.7,18.55 20.33,18.17 19.69,18.17 C44.1
N$17
  Top 0.152: 21.91,23.28 U$11.P$41 21.16,22.52 21.16,18.19 20.55,17.58 19.79,17.58 19.72,17.51 19.72,16.75 R16.1
N$18  (2 unrouted)
N$19  (1 unrouted)
N$21
  Top 0.152: C49.2 24.45,64.09 21.97,64.08 21.92,64.14 U$17.P$8
N$22
  Top 0.152: U$17.P$9 23.3,64.64 C49.1
N$23  (3 unrouted)
N$24
  Bottom 0.152: TP6.P$1 R5.2
N$26
  Bottom 0.152: TP5.P$1 R8.2
N$27
  Top 0.152: LED1.A 3.68,12.5 3.68,12.37 3.66,12.34 3.66,11.86 4.19,11.33 R7.1
N$32
  Bottom 0.152: TP1.P$1 R3.2
N$33
  Bottom 0.152: TP2.P$1 R4.2
N$34
  Bottom 0.152: R6.2 TP3.P$1
SCL-0  (via drill 0.41)
  Top 0.152: U$11.P$23 22.84,31.52 23.85,31.52 v24.43,30.94 | U$1.P$7 34.81,63.65 v35.24,63.22 36.05,62.41 U$22.P$10 | v36,44.06 U$5.P$8
  Bottom 0.152: v35.24,63.22 R5.1 35.26,45.26 36,44.52 v36,44.06 36,42.52 v24.43,30.94 R1.1
SCLK-A
  Top 0.152: 19.47,29.95 U$11.P$30 19.12,30.29 U$14.P$6
SCLK-B  (via drill 0.41)
  Top 0.152: U$10.P$4 v32.08,51.83 | U$9.P$4 6.29,54.16 v5.89,54.56 | U$17.P$21 v10.81,65.14 | U$15.P$4 7.03,26.17 v6.83,26.29 | v6.83,51.83 v10.06,51.83 | U$19.P$4 v15.54,51.83 | U$2.P$4 v25.58,51.83 | U$3.P$2 7.48,43.37 6.91,42.8 v6.83,42.8 | U$14.P$15 10.37,30.3 v6.83,30.3 | U$6.P$4 8.1,68.43 v7.9,68.22 | U$4.P$4 7.25,36.19 6.22,36.19 v6.1,36.32
  Bottom 0.152: 6.83,36.19 v6.83,30.3 v6.83,26.29 R3.1 | 6.83,36.19 v6.83,42.8 v6.83,51.83 6.83,54.15 | v10.06,51.83 v15.54,51.83 v25.58,51.83 v32.08,51.83 | 6.83,54.15 6.83,64.67 7.29,65.14 | 7.29,65.14 7.29,67.61 v7.9,68.22 | v5.89,54.56 6.3,54.15 6.83,54.15 | v10.81,65.14 7.29,65.14 | v6.1,36.32 6.22,36.19 6.83,36.19
SD-CARD-INSERT  (via drill 0.41)
  Top 0.152: U$11.P$60 32.46,23.31 v36.22,23.31
  Bottom 0.152: v36.22,23.31 36.66,22.88 U$18.P$8
SD-CS  (via drill 0.41)
  Top 0.152: U$11.P$62 32.66,24.53 v32.82,24.51
  Bottom 0.152: U$18.P$2 30.4,21.53 32.82,23.95 v32.82,24.51
SD-MISO  (via drill 0.41)
  Top 0.152: U$11.P$63 32.79,25.11 v35.33,25.11
  Bottom 0.152: U$18.P$7 35.9,20.85 35.31,21.44 35.31,25.08 v35.33,25.11
SD-MOSI  (via drill 0.41)
  Top 0.152: U$11.P$64 32.89,25.71 v33.43,25.71
  Bottom 0.152: U$18.P$3 31.5,21.11 33.43,23.04 v33.43,25.71
SD-SCLK  (via drill 0.41)
  Top 0.152: U$11.P$61 32.56,23.92 v34.14,23.92
  Bottom 0.152: U$18.P$5 33.7,20.69 34.14,21.13 v34.14,23.92
SDA-0  (via drill 0.41)
  Top 0.152: U$11.P$24 22.85,30.8 v23.16,30.8 | U$1.P$6 34.41,63.65 v33.99,63.22 33.25,62.48 U$22.P$1 | v34.75,44.06 34.75,43.76 U$5.P$7
  Bottom 0.152: v33.99,63.22 R8.1 34.01,44.79 v34.75,44.06 34.75,42.39 v23.16,30.8 | R2.1 v23.16,30.8 | v23.16,30.8
SPI-ADDR0
  Top 0.152: U$11.P$17 21.56,37.04 U$21.P$15
SPI-ADDR1
  Top 0.152: U$11.P$18 20.74,37.16 20.45,37.16 20.29,37.31 U$21.P$14
SPI-ADDR2
  Top 0.152: U$11.P$19 20.51,36.68 19.41,36.68 19.02,37.06 U$21.P$13
SPI-ADDR3
  Top 0.152: U$11.P$20 20.29,36.19 18.24,36.19 17.75,36.68 U$21.P$12
SPI-ENABLE  (via drill 0.41)
  Top 0.152: 19.14,29.57 U$11.P$31 19.17,29.54 v17.17,29.54 | v17.17,32.89 17.06,32.89 U$14.P$10
  Bottom 0.152: v17.17,29.54 v17.17,32.89
SWCLK  (via drill 0.41)
  Top 0.152: U$11.P$52 31.01,19.11 v31.01,18.34
  Bottom 0.152: U$7.P$1 30.99,18.31 v31.01,18.34
SWDIO  (via drill 0.41)
  Top 0.152: U$11.P$51 30,19.41 v30,18.34
  Bottom 0.152: U$7.P$2 v29.99,18.33 v30,18.34
SWO  (via drill 0.41)
  Top 0.152: U$11.P$49 27.97,20.03 v27.97,18.34
  Bottom 0.152: U$7.P$4 27.99,18.31 v27.97,18.34
TDI  (via drill 0.41)
  Top 0.152: U$11.P$50 28.98,19.72 v28.98,18.34
  Bottom 0.152: U$7.P$3 v28.99,18.33 v28.98,18.34
U1RX  (via drill 0.41)
  Top 0.152: U$11.P$45 22.81,21.34 22.81,19.33 22.2,18.72 v22.2,17.81
  Bottom 0.152: 20.5,13.16 TP8.P$1 20.55,16.15 v22.2,17.81
U1TX  (via drill 0.41)
  Top 0.152: U$11.P$46 23.19,21.02 v23.19,18.82
  Bottom 0.152: TP7.P$1 23.67,18.29 v23.19,18.82